# Altium PCB ECE453_Interface.PcbDoc
Units mil, origin at the board's own origin, x right, y up, seen from the top; angles counter-clockwise.
Board outline 3947.04 x 3950.03 mil, 2 copper layers (Top Layer, Bottom Layer); 5 components, 3 nets, 29 pads, 0 vias.
Unrouted connection lines stored in the file: 26.
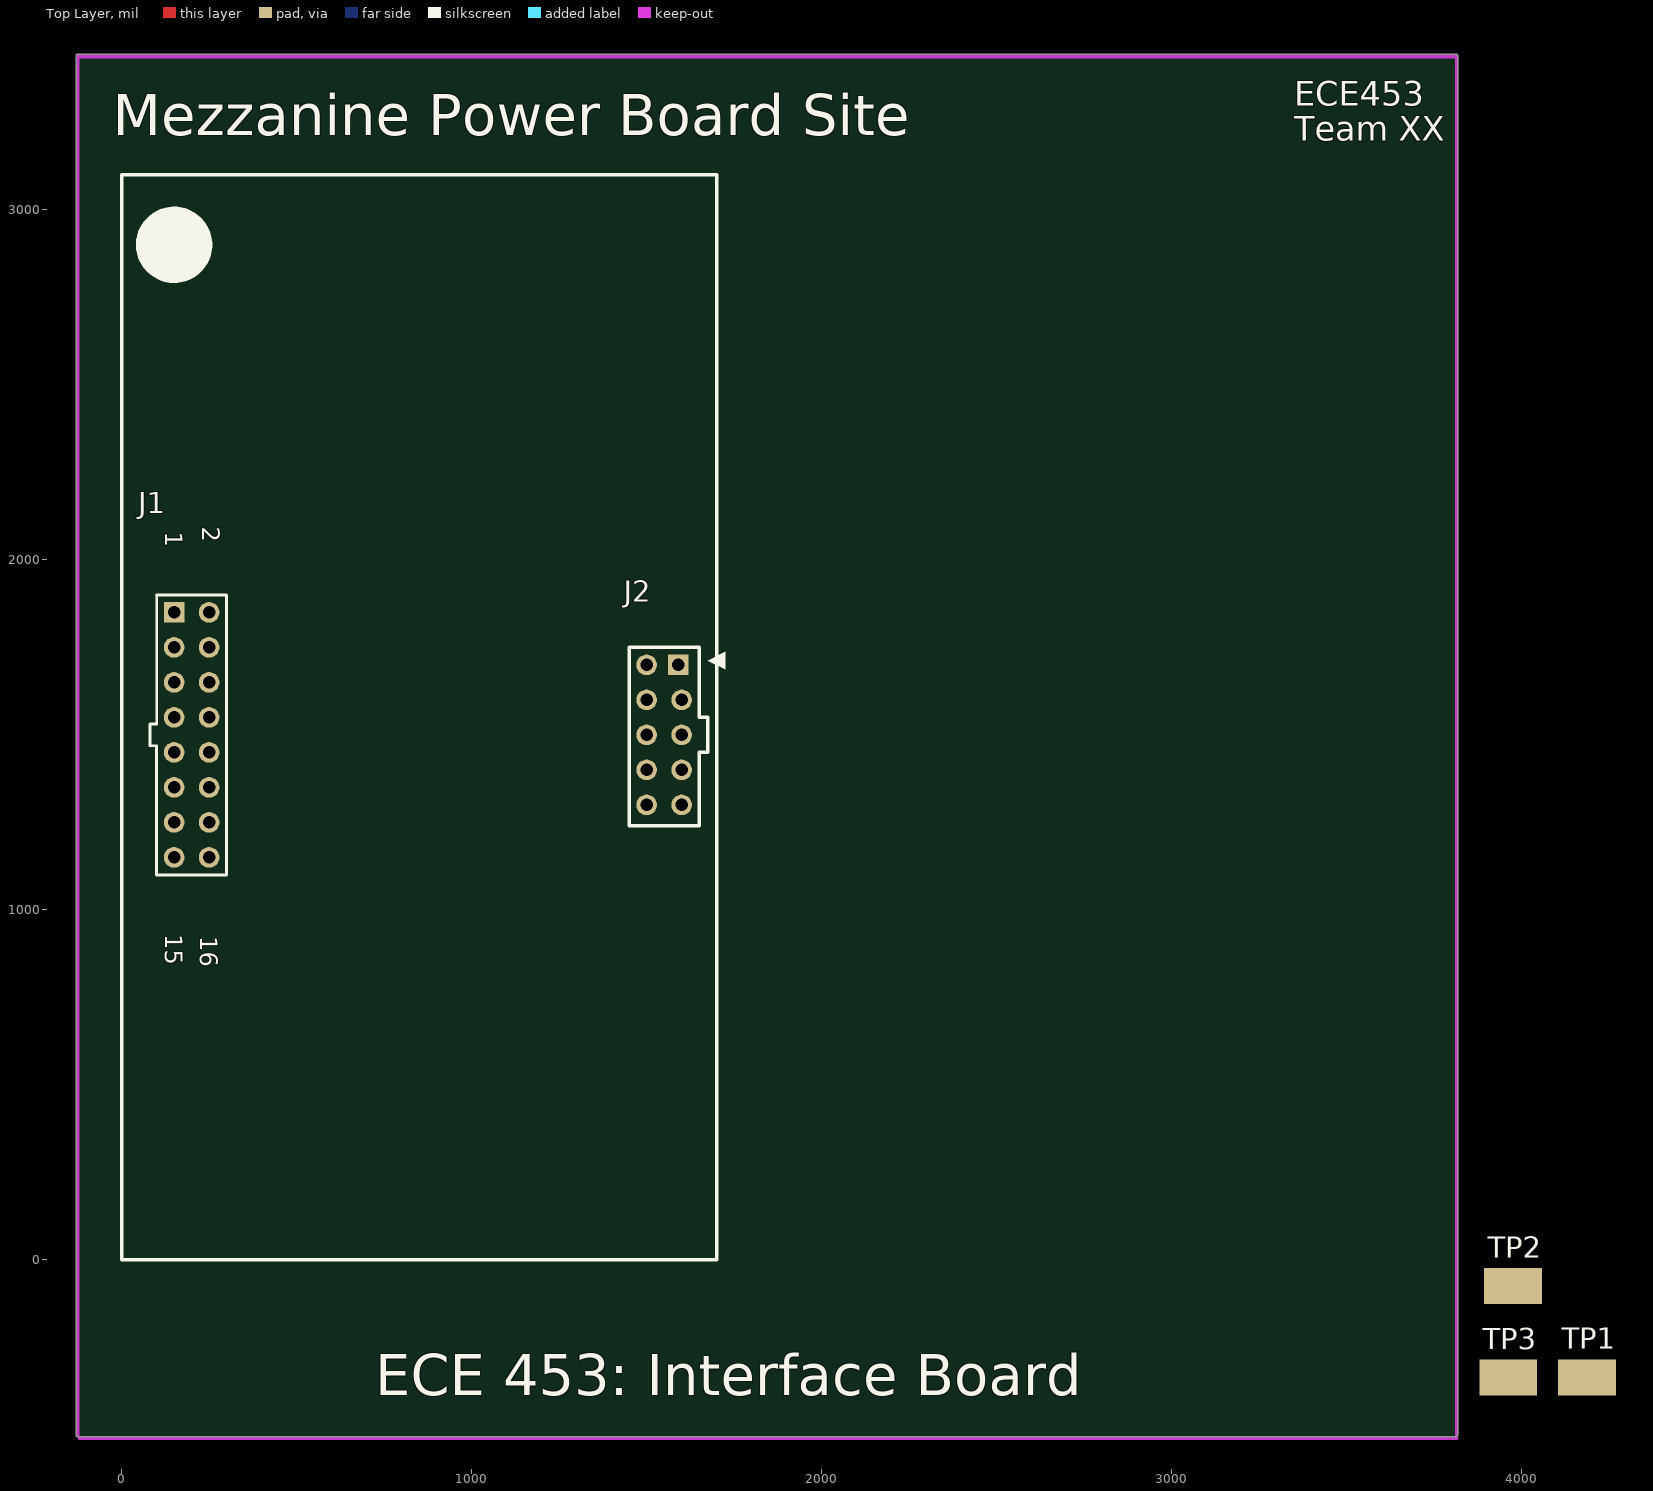
[diagram p0: Top Layer view]
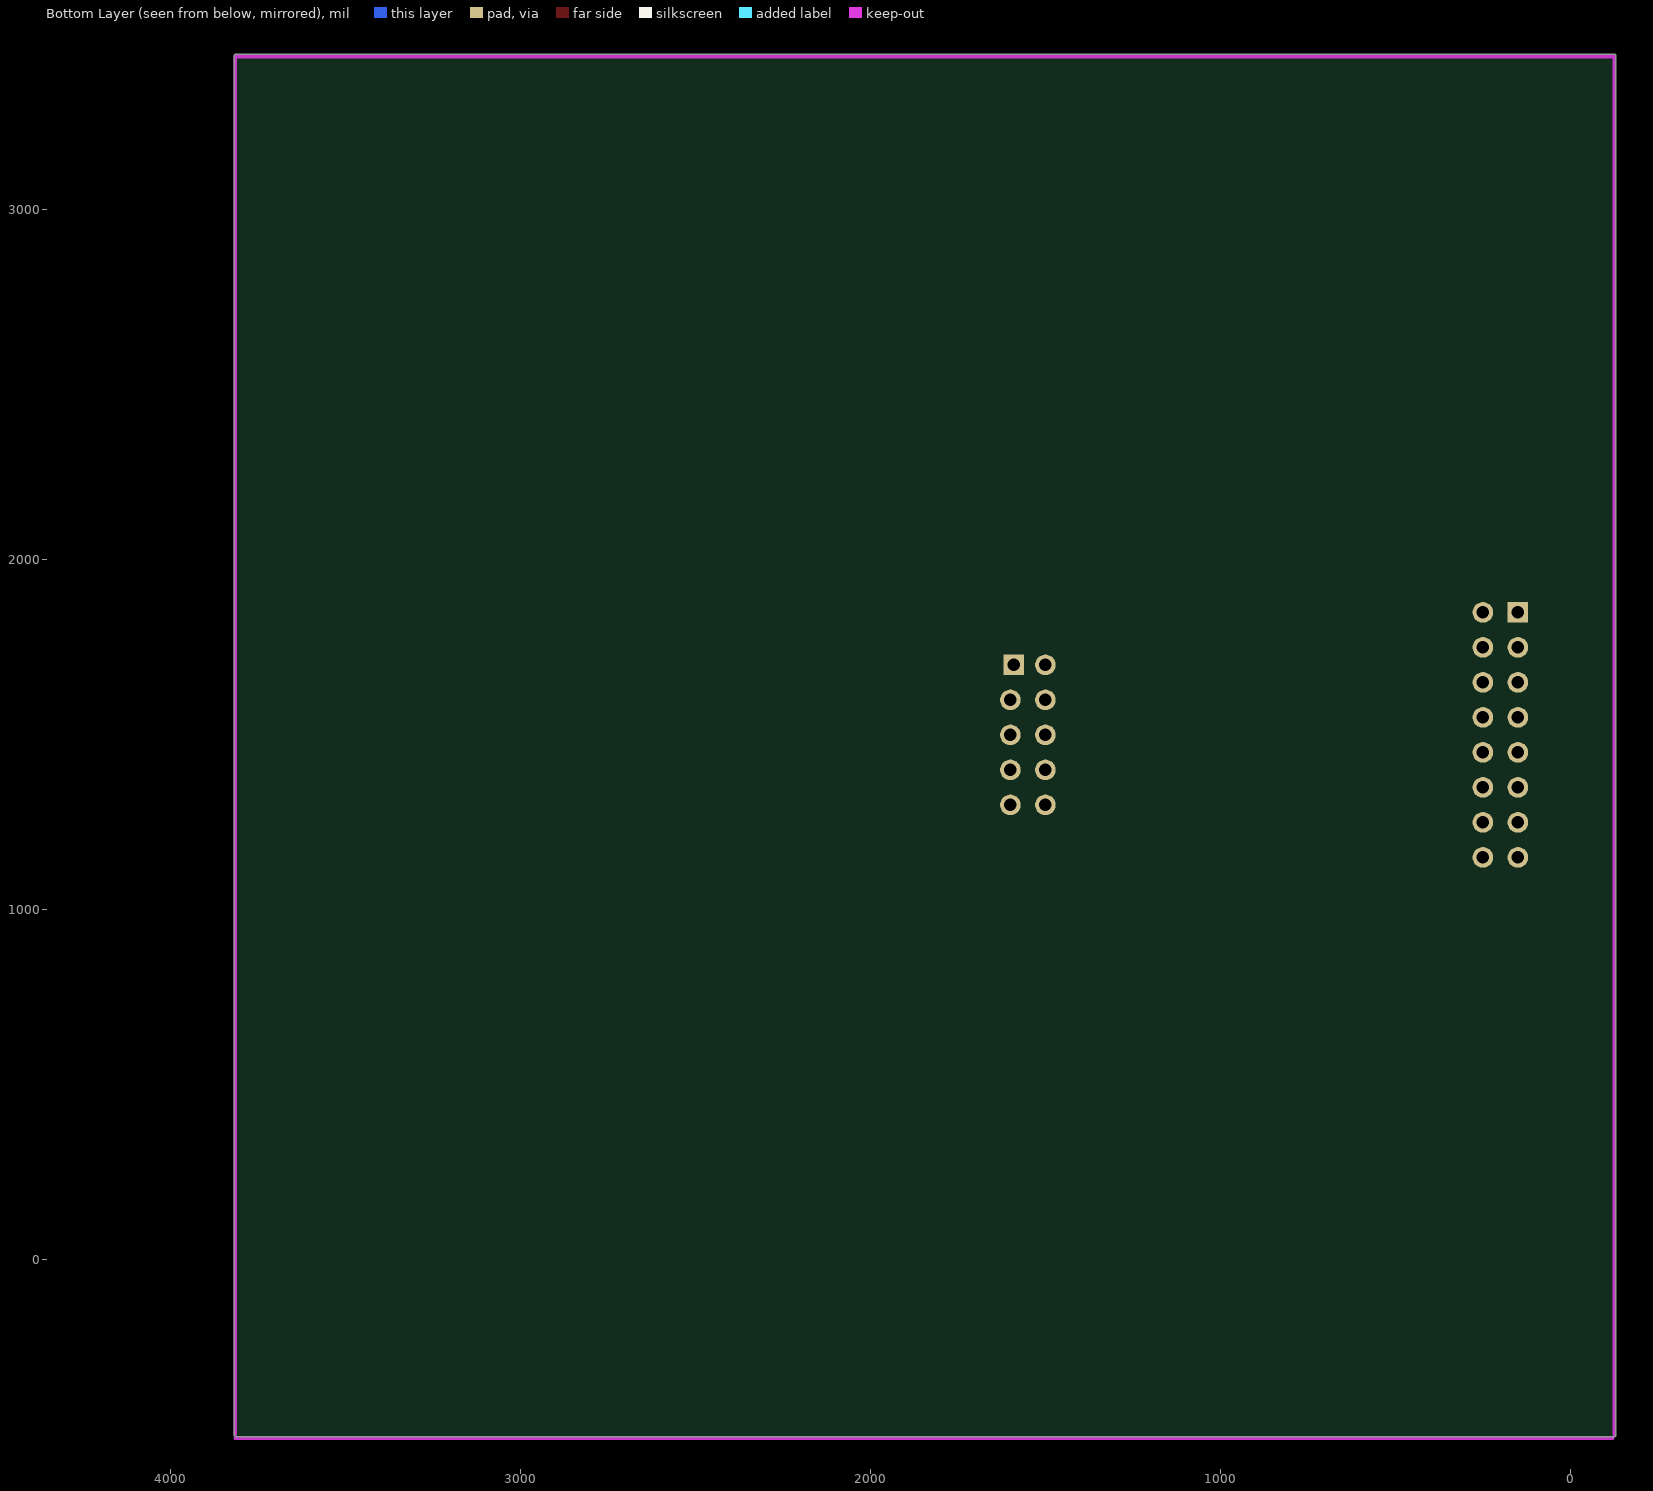
[diagram p1: Bottom Layer view, seen from below]

## Layer stack, top to bottom
Top Solder: solder mask 0.4, Solder Resist, Dk 3.5
Top Layer: signal copper 1.4
Dielectric1: dielectric 12.6, FR-4, Dk 4.8
Bottom Layer: signal copper 1.4
Bottom Solder: solder mask 0.4, Solder Resist, Dk 3.5

## Board outline
-130.02,-500 ccw(c-125,-500) -125,-505.01 3812.01,-505.01 ccw(c3812.01,-500) 3817.02,-500 3817.02,3437.01 ccw(c3812.01,3437.01) 3816.79,3438.5 ccw(c3812.01,3440) 3817.02,3440 ccw(c3812.01,3440) 3812.01,3445.02 -125,3445.02 ccw(c-125,3440) -130.02,3440

## Design rules (kind name [scope] priority, off if disabled: settings)
Clearance Polygon_Clearance [All vs InPolygon] p1: gap=12 ignorepadtopadclearanceinfootprint=FALSE except(0: Arc-Hole Track-Hole SMDPad-Hole THPad-Hole Via-Hole Fill-Hole Poly-Hole Region-Hole Text-Hole)
Clearance [All] p2: gap=7.87 ignorepadtopadclearanceinfootprint=TRUE except(0: Arc-Hole Track-Hole SMDPad-Hole THPad-Hole Via-Hole Fill-Hole Poly-Hole Region-Hole Text-Hole)
ComponentClearance [InComponent('U3')] p1: gap=0 collisioncheckmode=3 verticalgap=10 showdistances=FALSE
Height [All] p1: minheight=0 maxheight=866.14 prefheight=500
HoleSize [All] p1: absolutevalues=TRUE maxlimit=250 minlimit=1.18 maxpercent=80.000 minpercent=20.000
MinimumSolderMaskSliver [All] p1: minsoldermaskwidth=7
NetAntennae NetAntennae_5.0V [InNet('5.0V')] p1: netantennaetolerance=0
NetAntennae NetAntennae_3.3V [InNet('3.3V')] p2: netantennaetolerance=0
PolygonConnect [IsNamedPolygon('5.0V_L01_P019') or IsNamedPolygon('3.3V_L01_P020') vs IsVia] p1: connectstyle=Relief reliefconductorwidth=10 reliefentries=4 polygonreliefangle="90 Angle" airgapwidth=10
PolygonConnect PolygonConnect_2 [All vs IsVia] p2: connectstyle=Relief reliefconductorwidth=15 reliefentries=4 polygonreliefangle="90 Angle" airgapwidth=10
PolygonConnect PolygonConnect_1 [All] p3: connectstyle=Relief reliefconductorwidth=10 reliefentries=4 polygonreliefangle="90 Angle" airgapwidth=10
RoutingVias [All] p1: holewidth=28 width=50 viastyle="Through Hole" minholewidth=15 minwidth=25 maxholewidth=28 maxwidth=50
SolderMaskExpansion [All] p1: expansion=4
Width [All] p1: maxlimit=472.44 minlimit=3.94 preferedwidth=10 minimp=50.000000 maximp=50.000000 favimp=50.000000
25 further rules are at their usual default settings.

## Classes and differential pairs
component class "02 ECE453-Digital-Interface": TP1 TP2

## Components (designator, comment, footprint, x,y, rotation, side; value= is the part's Value field where it differs from the comment)
J1 "SFH11-PBPC-D08-ST-BK" SFH11-PBPC-D08-ST-BK 200,1500 r270 top
J2 "SFH11-PBPC-D05-ST-BK" SFH11-PBPC-D05-ST-BK 1500,1500 r270 top
TP1 "TP_1206" TP-SMC-1206 4186.54,-335.83 r0 top
TP2 "TP_1206" TP-SMC-1206 3975,-75 r0 top
TP3 "TP_1206" TP-SMC-1206 3961.54,-335.83 r0 top

## Footprints (in the part's own frame and the unit in brackets; to place one, negate y for a bottom-side part, rotate by r counter-clockwise, add the part's x,y. Pads: shape width x height; smd on the part's side, far side on the other; paste and mask are expansions set on the pad)
SFH11-PBPC-D05-ST-BK [mm] "CONN HEADR FMALE 10POS .1\" DL AU"
  rect 1.5x1.5 hole 0.9: 1(-5.08,2.286)
  round 1.5 hole 0.9: 2(-5.08,0) 3(-2.54,2.54) 4(-2.54,0) 5(0,2.54) 6(0,0) 7(2.54,2.54) 8(2.54,0) 9(5.08,2.54) 10(5.08,0)
  silkscreen extent -6.35,-1.27 6.6,5.71, body extent -8.89,-1.92 8.89,5.08, height 8.39
SFH11-PBPC-D08-ST-BK [mm] "CONN HEADR FMALE 16POS .1\" DL AU"
  rect 1.5x1.5 hole 0.9: 1(-8.89,-1.27)
  round 1.5 hole 0.9: 2(-8.89,1.27) 3(-6.35,-1.27) 4(-6.35,1.27) 5(-3.81,-1.27) 6(-3.81,1.27) 7(-1.27,-1.27) 8(-1.27,1.27) 9(1.27,-1.27) 10(1.27,1.27) 11(3.81,-1.27) 12(3.81,1.27) 13(6.35,-1.27) 14(6.35,1.27) 15(8.89,-1.27) 16(8.89,1.27)
  silkscreen extent -10.16,-3.03 10.17,2.54, body extent -12.57,-4.13 12.83,2.87, height 8.85
TP-SMC-1206 [mm] "Surface mount test point 1206"
  rect 4.2x2.6 smd mask+0: 1(0,0)
  body extent -1.57,-0.79 1.63,0.81, height 1.22

## Part data
J1: "CONN HDR 10POS 0.1 GOLD PCB", Color=Black, Manufacturer 1=Sullins, Package Quantity=1, Supplier Part Number 1=S9196-ND, ComponentLink1Description=https://datasheet.ciiva.com/754/sfh11-pxxc-dxx-st-xx11160-c-754555.pdf?src-supplier=Digi-Key, ComponentLink1URL=https://datasheet.ciiva.com/754/sfh11-pxxc-dxx-st-xx11160-c-754555.pdf?src-supplier=Digi-Key, ComponentLink2Description=https://datasheet.ciiva.com/754/sfh11-pxxc-dxx-st-xx11160-c-754557.pdf?src-supplier=Digi-Key, ComponentLink2URL=https://datasheet.ciiva.com/754/sfh11-pxxc-dxx-st-xx11160-c-754557.pdf?src-supplier=Digi-Key, Connector Type=Header,Socket, Contact Plating=Gold, Lead Free="Lead Free", Manufacturer Part Number 1=SFH11-PBPC-D08-ST-BK, Mount="Through Hole", Number of Positions=16, Number of Rows=2, Packaging=Tray, Pitch=0.1inch, Pricing 1="1=1.04000, 10=0.91600, 100=0.79000, 500=0.64638, 1000=0.57456, 5000=0.51870 (USD)", RoHS=Yes, Row Spacing=0.1inch, Stock 1=0, Supplier 1=Digi-Key, Termination=Solder
J2: "CONN HDR 10POS 0.1 GOLD PCB", Color=Black, Manufacturer 1=Sullins, Package Quantity=1, Supplier Part Number 1=S9194-ND, ComponentLink1Description=https://datasheet.ciiva.com/754/sfh11-pxxc-dxx-st-xx11160-c-754555.pdf?src-supplier=Digi-Key, ComponentLink1URL=https://datasheet.ciiva.com/754/sfh11-pxxc-dxx-st-xx11160-c-754555.pdf?src-supplier=Digi-Key, Connector Type=Header, Contact Plating=Gold, Lead Free="Lead Free", Manufacturer Part Number 1=SFH11-PBPC-D05-ST-BK, Mount="Through Hole", Number of Positions=10, Number of Rows=2, Packaging=Tray, Pitch=0.1inch, Pricing 1="1=0.66000, 10=0.57600, 100=0.49700, 500=0.40662, 1000=0.36144, 5000=0.32630 (USD)", RoHS=Yes, Row Spacing=0.1inch, Stock 1=26289, Supplier 1=Digi-Key, Termination=Solder
TP1 TP2 TP3: "Test Point SMD 1206", Supplier Part Number 1=A106143CT-ND, Supplier 1=Digi-Key

## Nets (pads, with @x,y where several pads share a name; then routed paths per layer and width w, separated by ;. In a path a pad name is that pad's centre, name@x,y a point inside that pad or via, vN(x,y) a via of type N, cw(c..) or ccw(c..) an arc to the next point about the centre after c; other vN are vias at no path point)
GND: J1.1 J1.3 J1.5 J1.7 J1.9 J1.11 J1.13 J1.15 J2.1 J2.3 J2.5 J2.7 J2.9 TP3.1
V_3.3: J1.2 J1.4 J1.6 J1.8 J1.10 J1.12 J1.14 J1.16 TP2.1
V_RAW: J2.2 J2.4 J2.6 J2.8 J2.10 TP1.1

## Polygon pours and split planes (outlines as drawn)
GND on Bottom Layer "GND_L02_P008" (solid, pour order 8): 1994.53,-250

## Keep-outs
Keep-Out Layer:
  lines w10: -125,-500 -125,3437.01 1675,3437.01 3812.01,3437.01 ; -121.06,-510 3815,-510 ; 3815,-500 3815,3437.01

## Silkscreen, mask and mechanical layers (free items; w line width, h text height)
Top Overlay:
  circle w118.11: c150,2900 r50
  lines w10: 0,0 1700,0 1700,3000 1700,3100 1600,3100 1550,3100 0,3100 0,0
  text "ECE453" at 3350,3275 h120
  text "Mezzanine Power Board Site" at -25,3175 h200
  text "Team XX" at 3350,3175 h120
  text "ECE 453: Interface Board" at 725,-425 h200
Mechanical 9:
  lines w10: 3812.01,3437.01 3812.01,-500 -125,-500 -125,3440 1308.94,3440 3812.01,3440

## Dimensions
-125,-500 to 3815,-500 on Mechanical 13

## Text inside footprints (layer, text, board x,y; h text height)
J1: Top Overlay "16" at 225,925 h50 r270; Top Overlay "15" at 125,930 h50 r270; Top Overlay "1" at 125,2080 h50 r270; Top Overlay "2" at 230,2095 h50 r270